# EAGLE board ir-pcb-sheet (EAGLE 9.6.2), part 1 of 2
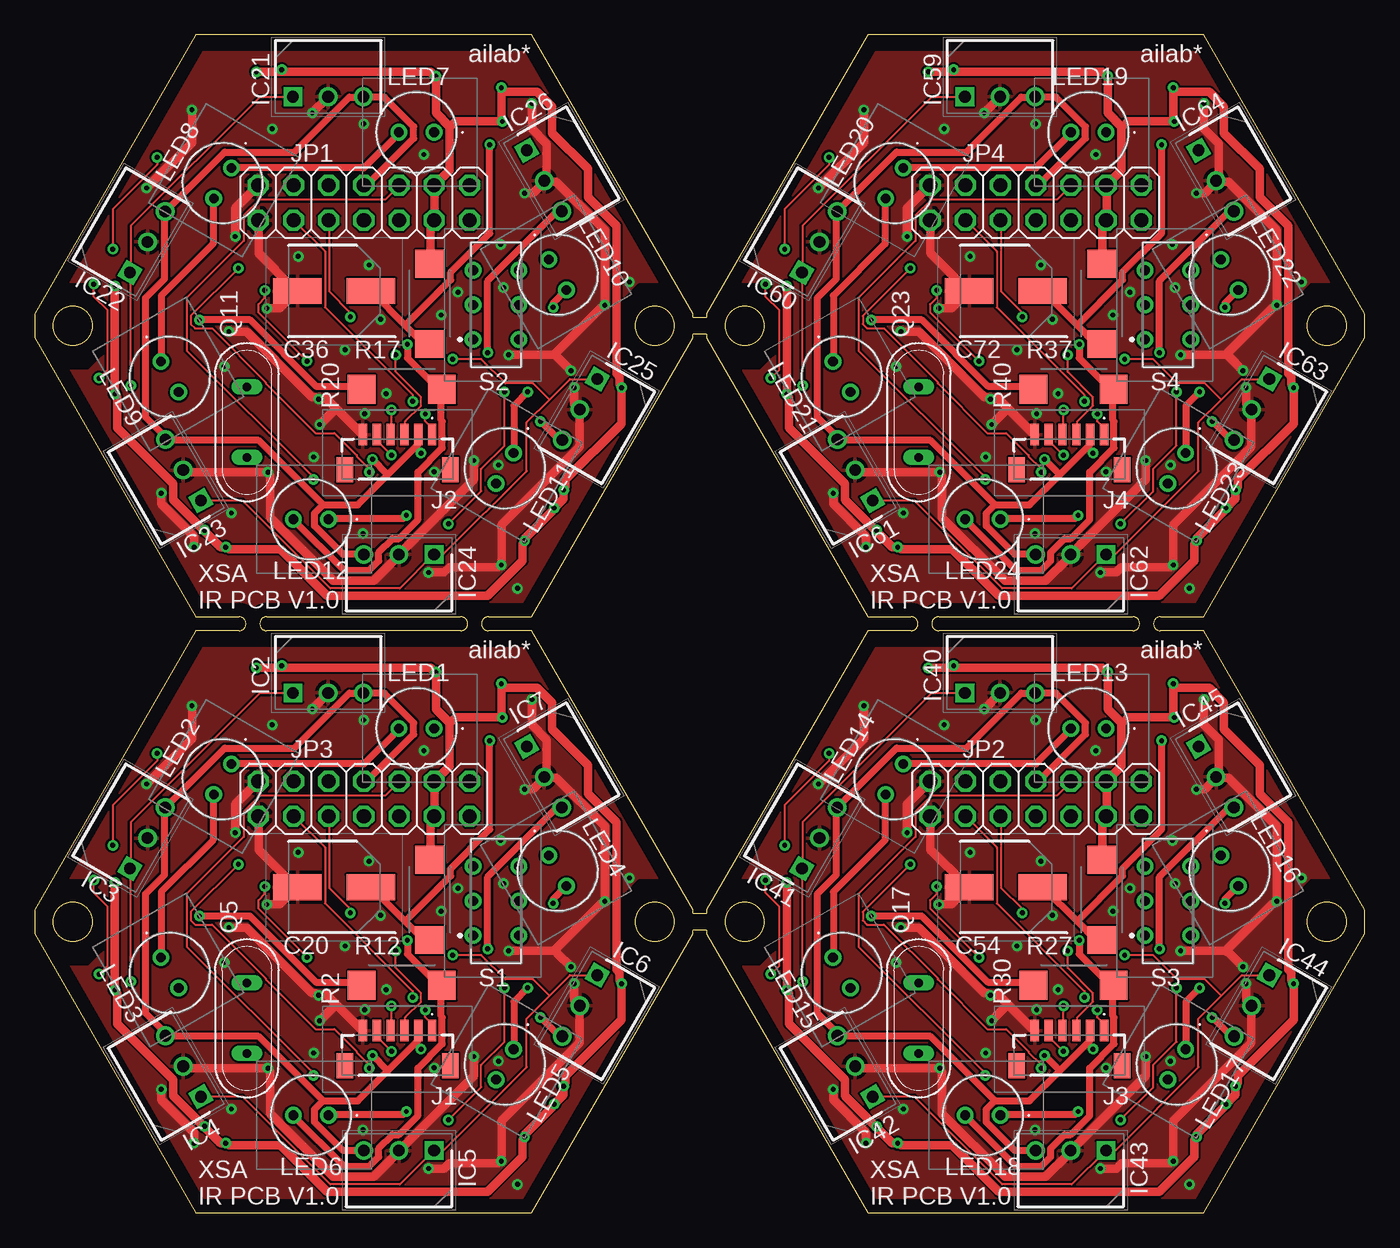
[diagram p0: board, top side]
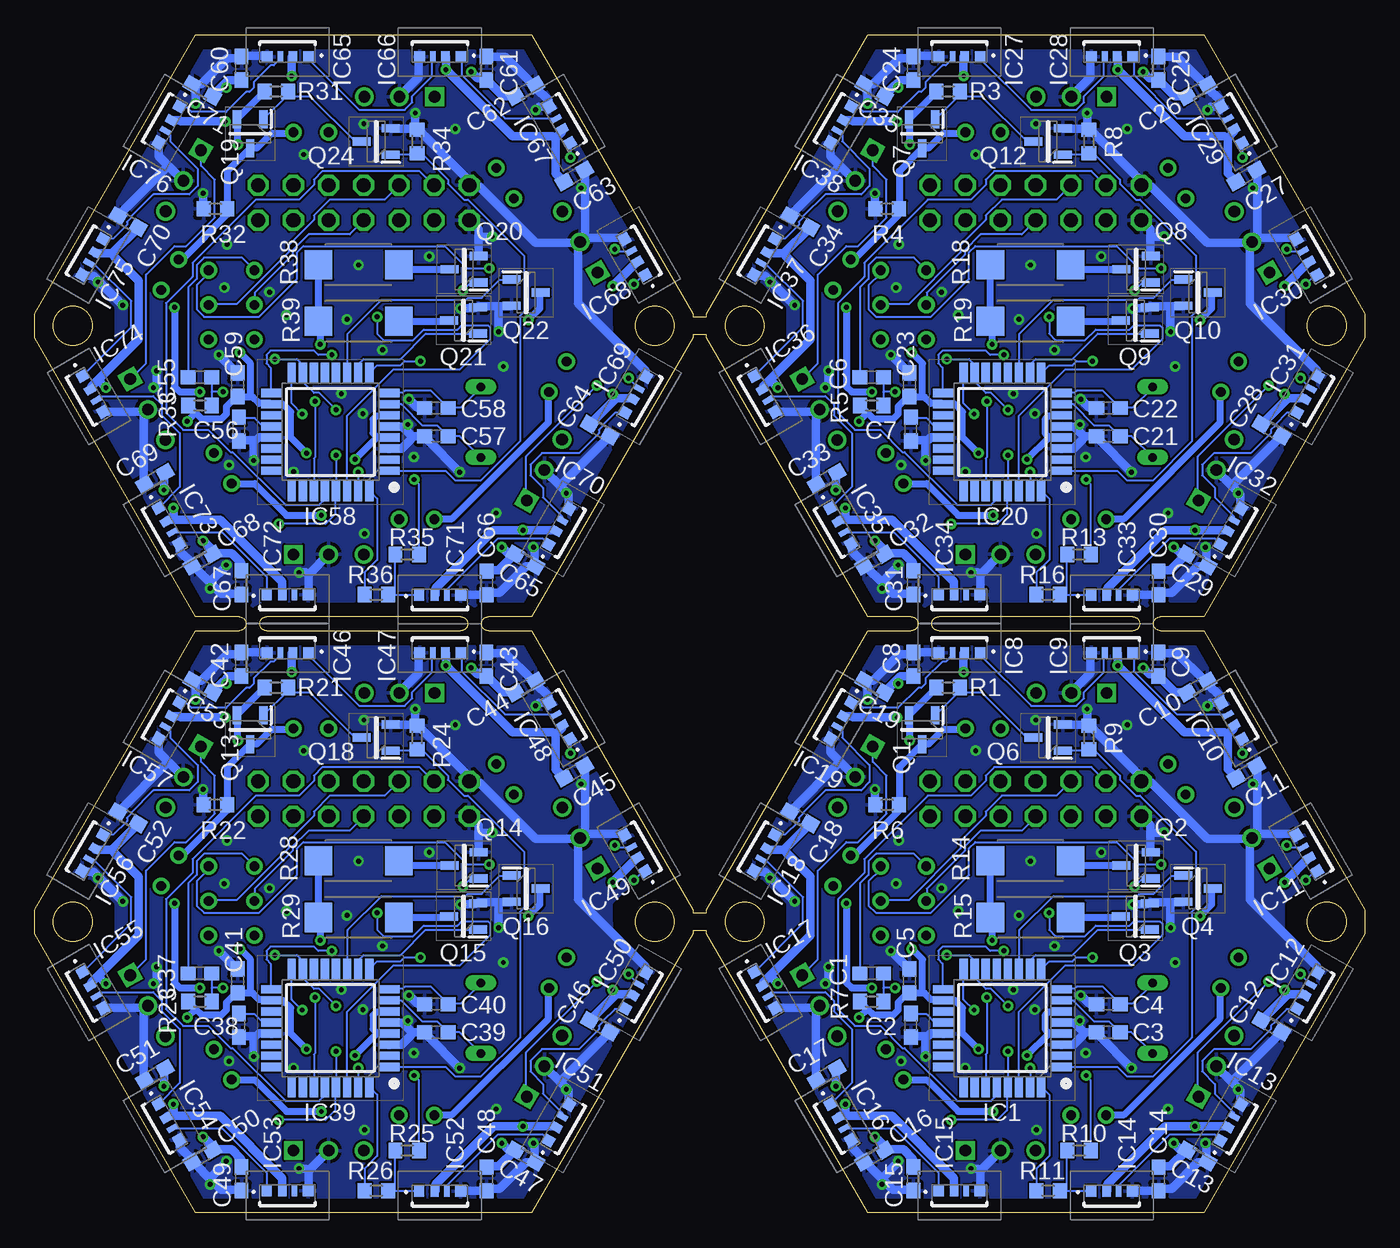
[diagram p1: board, bottom side, seen from below]

Size 96 x 85 mm. Coordinates in mm from the lower left corner, seen from the top.
Outline: 16.75,43 arc180 16.75,42 30.75,42 arc180 30.75,43 16.75,43
Outline: 14.75,42 arc180 14.75,43 11.63,43 0,63.14 0,64.86 11.63,85 35.87,85 47.5,64.86 47.5,64.6 48.5,64.6 48.5,64.86 60.13,85 84.37,85 96,64.86 96,63.14 84.37,43 81.25,43 arc180 81.25,42 84.37,42 96,21.86 96,20.14 84.37,0 60.13,0 48.5,20.14 48.5,20.4 47.5,20.4 47.5,20.14 35.87,0 11.63,0 0,20.14 0,21.86 11.63,42 14.75,42
Outline: 60.13,43 63.25,43 arc-180 63.25,42 60.13,42 48.5,21.86 48.5,21.6 47.5,21.6 47.5,21.86 35.87,42 32.75,42 arc-180 32.75,43 35.87,43 47.5,63.14 47.5,63.4 48.5,63.4 48.5,63.14 60.13,43
Outline: 65.25,43 79.25,43 arc-180 79.25,42 65.25,42 arc-180 65.25,43
Outline: circle at 93.25,64 radius 1.4
Outline: circle at 51.25,64 radius 1.4
Outline: circle at 44.75,64 radius 1.4
Outline: circle at 2.75,64 radius 1.4
Outline: circle at 93.25,21 radius 1.4
Outline: circle at 51.25,21 radius 1.4
Outline: circle at 44.75,21 radius 1.4
Outline: circle at 2.75,21 radius 1.4
Copper layers (1*16): Top 0.035mm / dielectric 1.5mm / Bottom 0.035mm
Design rules "default": minimum track width 6mil, minimum drill 0.35mm, track to track 6mil, track to pad 6mil, pad to pad 6mil, via to via 6mil, smd to smd 6mil, copper to edge 40mil, drill to drill 6mil, minimum pad ring 10mil, minimum via ring 8mil, stop-mask expansion 4mil, vias tented up to drill 0mil, thermal gap 10mil
Net classes: 1 POWER: width 0.508 mm; 2 LEDPOWER: width 0.61 mm

## Footprints (pad centres in the part's own frame; a part is rotated, then mirrored left to right if it is on the bottom)
C0603 = smd 1.1 x 1: 1 -0.85,0; 2 0.85,0
CAPAE660X800N = smd 3.5 x 1.85: 1 -2.65,0; 2 2.65,0
QFP80P900X900X120-32N = smd 1.5 x 0.6: 1 -4.25,2.8; 2 -4.25,2; 3 -4.25,1.2; 4 -4.25,0.4; 5 -4.25,-0.4; 6 -4.25,-1.2; 7 -4.25,-2; 8 -4.25,-2.8; 17 4.25,-2.8; 18 4.25,-2; 19 4.25,-1.2; 20 4.25,-0.4; 21 4.25,0.4; 22 4.25,1.2; 23 4.25,2; 24 4.25,2.8 | smd 0.6 x 1.5: 9 -2.8,-4.25; 10 -2,-4.25; 11 -1.2,-4.25; 12 -0.4,-4.25; 13 0.4,-4.25; 14 1.2,-4.25; 15 2,-4.25; 16 2.8,-4.25; 25 2.8,4.25; 26 2,4.25; 27 1.2,4.25; 28 0.4,4.25; 29 -0.4,4.25; 30 -1.2,4.25; 31 -2,4.25; 32 -2.8,4.25
TO254P525X740X825-3P = drill 0.84 pad 1.26 square: 1 0,0 | drill 0.84 pad 1.26: 2 2.54,0; 3 5.08,0
SK6812SIDE = smd 0.75 x 0.8: 1 -1.505,0.325 | smd 0.6 x 0.8: 2 -0.38,0.325 | smd 0.4 x 0.8: 3 0.5,0.325 | smd 0.8 x 0.8: 4 1.48,0.325
BM06BSRSSTBTLFSN = smd 0.6 x 1.55: 1 -2.5,-1.612; 2 -1.5,-1.612; 3 -0.5,-1.612; 4 0.5,-1.612; 5 1.5,-1.612; 6 2.5,-1.612 | smd 1.2 x 1.8: MP1 -3.8,0.912; MP2 3.8,0.912
2X07 = drill 1.016 octagon: 1 -7.62,-1.27; 2 -7.62,1.27; 3 -5.08,-1.27; 4 -5.08,1.27; 5 -2.54,-1.27; 6 -2.54,1.27; 7 0,-1.27; 8 0,1.27; 9 2.54,-1.27; 10 2.54,1.27; 11 5.08,-1.27; 12 5.08,1.27; 13 7.62,-1.27; 14 7.62,1.27
OSI5FU5111C40 = drill 0.7 pad 1.2: 1 0,0; 2 2.54,0
SOT95P237X112-3N = smd 1.3 x 0.6: 1 -1.05,0.95; 2 -1.05,-0.95; 3 1.05,0
QS = drill 0.61 long: 1 -2.54,0; 2 2.54,0
R0603 = smd 1 x 1.1: 1 -0.85,0; 2 0.85,0
R2512W = smd 2 x 2.1: 1 -2.896,0; 2 2.896,0
IS2235 = drill 0.7 pad 1.2: 1 -2.5,1.65; 2 0,1.65; 3 2.5,1.65; 4 -2.5,-1.65; 5 0,-1.65; 6 2.5,-1.65

## Placement (x,y rotation side)
C1  0.1u  [C0603]  35.59,17.27 0 bottom
C2  0.1u  [C0603]  32.77,13.54 90 bottom
C3  22p  [C0603]  18.52,13.03 0 bottom
C4  22p  [C0603]  18.52,15.06 0 bottom
C5  0.1u  [C0603]  32.87,16.74 270 bottom
C6  0.1u  [C0603]  35.59,60.27 0 bottom
C7  0.1u  [C0603]  32.77,56.54 90 bottom
C8  0.1u  [C0603]  32.59,39.57 270 bottom
C9  0.1u  [C0603]  14.91,39.57 270 bottom
C10  0.1u  [C0603]  12.09,37.95 210 bottom
C11  0.1u  [C0603]  8.56,31.8 210 bottom
C12  0.1u  [C0603]  6.73,13.46 150 bottom
C13  0.1u  [C0603]  12.09,4.09 150 bottom
C14  0.1u  [C0603]  14.88,2.44 90 bottom
C15  0.1u  [C0603]  32.59,2.46 90 bottom
C16  0.1u  [C0603]  35.41,4.09 30 bottom
C17  0.1u  [C0603]  38.84,9.98 30 bottom
C18  0.1u  [C0603]  40.77,28.5 330 bottom
C19  0.1u  [C0603]  35.41,37.97 330 bottom
C20  25PFV100M6.3X8  [CAPAE660X800N]  21.62,23.5 180 top
C21  22p  [C0603]  18.52,56.03 0 bottom
C22  22p  [C0603]  18.52,58.06 0 bottom
C23  0.1u  [C0603]  32.87,59.74 270 bottom
C24  0.1u  [C0603]  32.59,82.58 270 bottom
C25  0.1u  [C0603]  14.91,82.58 270 bottom
C26  0.1u  [C0603]  12.09,80.95 210 bottom
C27  0.1u  [C0603]  8.56,74.8 210 bottom
C28  0.1u  [C0603]  6.73,56.46 150 bottom
C29  0.1u  [C0603]  12.09,47.09 150 bottom
C30  0.1u  [C0603]  14.88,45.44 90 bottom
C31  0.1u  [C0603]  32.59,45.47 90 bottom
C32  0.1u  [C0603]  35.41,47.09 30 bottom
C33  0.1u  [C0603]  38.84,52.98 30 bottom
C34  0.1u  [C0603]  40.77,71.5 330 bottom
C35  0.1u  [C0603]  35.41,80.98 330 bottom
C36  25PFV100M6.3X8  [CAPAE660X800N]  21.62,66.5 180 top
C37  0.1u  [C0603]  84.07,17.27 0 bottom
C38  0.1u  [C0603]  81.25,13.54 90 bottom
C39  22p  [C0603]  67.01,13.03 0 bottom
C40  22p  [C0603]  67.01,15.06 0 bottom
C41  0.1u  [C0603]  81.36,16.74 270 bottom
C42  0.1u  [C0603]  81.08,39.57 270 bottom
C43  0.1u  [C0603]  63.4,39.57 270 bottom
C44  0.1u  [C0603]  60.58,37.95 210 bottom
C45  0.1u  [C0603]  57.05,31.8 210 bottom
C46  0.1u  [C0603]  55.22,13.46 150 bottom
C47  0.1u  [C0603]  60.58,4.09 150 bottom
C48  0.1u  [C0603]  63.37,2.44 90 bottom
C49  0.1u  [C0603]  81.08,2.46 90 bottom
C50  0.1u  [C0603]  83.9,4.09 30 bottom
C51  0.1u  [C0603]  87.33,9.98 30 bottom
C52  0.1u  [C0603]  89.26,28.5 330 bottom
C53  0.1u  [C0603]  83.9,37.97 330 bottom
C54  25PFV100M6.3X8  [CAPAE660X800N]  70.1,23.5 180 top
C55  0.1u  [C0603]  84.07,60.27 0 bottom
C56  0.1u  [C0603]  81.25,56.54 90 bottom
C57  22p  [C0603]  67.01,56.03 0 bottom
C58  22p  [C0603]  67.01,58.06 0 bottom
C59  0.1u  [C0603]  81.36,59.74 270 bottom
C60  0.1u  [C0603]  81.08,82.58 270 bottom
C61  0.1u  [C0603]  63.4,82.58 270 bottom
C62  0.1u  [C0603]  60.58,80.95 210 bottom
C63  0.1u  [C0603]  57.05,74.8 210 bottom
C64  0.1u  [C0603]  55.22,56.46 150 bottom
C65  0.1u  [C0603]  60.58,47.09 150 bottom
C66  0.1u  [C0603]  63.37,45.44 90 bottom
C67  0.1u  [C0603]  81.08,45.47 90 bottom
C68  0.1u  [C0603]  83.9,47.09 30 bottom
C69  0.1u  [C0603]  87.33,52.98 30 bottom
C70  0.1u  [C0603]  89.26,71.5 330 bottom
C71  0.1u  [C0603]  83.9,80.98 330 bottom
C72  25PFV100M6.3X8  [CAPAE660X800N]  70.1,66.5 180 top
IC1  ATMEGA328P-AU  [QFP80P900X900X120-32N]  26.16,13.34 180 bottom
IC2  PL-IRM0101  [TO254P525X740X825-3P]  18.64,37.52 0 top
IC3  PL-IRM0101  [TO254P525X740X825-3P]  6.88,24.84 60 top
IC4  PL-IRM0101  [TO254P525X740X825-3P]  11.99,8.38 120 top
IC5  PL-IRM0101  [TO254P525X740X825-3P]  28.83,4.5 180 top
IC6  PL-IRM0101  [TO254P525X740X825-3P]  40.61,17.14 240 top
IC7  PL-IRM0101  [TO254P525X740X825-3P]  35.51,33.66 300 top
IC8  SK6812_SIDE  [SK6812SIDE]  29.26,40.74 180 bottom
IC9  SK6812_SIDE  [SK6812SIDE]  18.26,40.74 180 bottom
IC10  SK6812_SIDE  [SK6812SIDE]  9.35,35.66 120 bottom
IC11  SK6812_SIDE  [SK6812SIDE]  3.91,26.11 120 bottom
IC12  SK6812_SIDE  [SK6812SIDE]  3.86,15.88 60 bottom
IC13  SK6812_SIDE  [SK6812SIDE]  9.4,6.35 60 bottom
IC14  SK6812_SIDE  [SK6812SIDE]  18.26,1.24 0 bottom
IC15  SK6812_SIDE  [SK6812SIDE]  29.26,1.27 0 bottom
IC16  SK6812_SIDE  [SK6812SIDE]  38.1,6.38 300 bottom
IC17  SK6812_SIDE  [SK6812SIDE]  43.59,15.9 300 bottom
IC18  SK6812_SIDE  [SK6812SIDE]  43.61,26.11 240 bottom
IC19  SK6812_SIDE  [SK6812SIDE]  38.1,35.66 240 bottom
IC20  ATMEGA328P-AU  [QFP80P900X900X120-32N]  26.16,56.34 180 bottom
IC21  PL-IRM0101  [TO254P525X740X825-3P]  18.64,80.52 0 top
IC22  PL-IRM0101  [TO254P525X740X825-3P]  6.88,67.84 60 top
IC23  PL-IRM0101  [TO254P525X740X825-3P]  11.99,51.38 120 top
IC24  PL-IRM0101  [TO254P525X740X825-3P]  28.83,47.5 180 top
IC25  PL-IRM0101  [TO254P525X740X825-3P]  40.61,60.15 240 top
IC26  PL-IRM0101  [TO254P525X740X825-3P]  35.51,76.66 300 top
IC27  SK6812_SIDE  [SK6812SIDE]  29.26,83.74 180 bottom
IC28  SK6812_SIDE  [SK6812SIDE]  18.26,83.74 180 bottom
IC29  SK6812_SIDE  [SK6812SIDE]  9.35,78.66 120 bottom
IC30  SK6812_SIDE  [SK6812SIDE]  3.91,69.11 120 bottom
IC31  SK6812_SIDE  [SK6812SIDE]  3.86,58.88 60 bottom
IC32  SK6812_SIDE  [SK6812SIDE]  9.4,49.35 60 bottom
IC33  SK6812_SIDE  [SK6812SIDE]  18.26,44.25 0 bottom
IC34  SK6812_SIDE  [SK6812SIDE]  29.26,44.27 0 bottom
IC35  SK6812_SIDE  [SK6812SIDE]  38.1,49.38 300 bottom
IC36  SK6812_SIDE  [SK6812SIDE]  43.59,58.9 300 bottom
IC37  SK6812_SIDE  [SK6812SIDE]  43.61,69.11 240 bottom
IC38  SK6812_SIDE  [SK6812SIDE]  38.1,78.66 240 bottom
IC39  ATMEGA328P-AU  [QFP80P900X900X120-32N]  74.65,13.34 180 bottom
IC40  PL-IRM0101  [TO254P525X740X825-3P]  67.13,37.52 0 top
IC41  PL-IRM0101  [TO254P525X740X825-3P]  55.37,24.84 60 top
IC42  PL-IRM0101  [TO254P525X740X825-3P]  60.48,8.38 120 top
IC43  PL-IRM0101  [TO254P525X740X825-3P]  77.32,4.5 180 top
IC44  PL-IRM0101  [TO254P525X740X825-3P]  89.1,17.14 240 top
IC45  PL-IRM0101  [TO254P525X740X825-3P]  84,33.66 300 top
IC46  SK6812_SIDE  [SK6812SIDE]  77.75,40.74 180 bottom
IC47  SK6812_SIDE  [SK6812SIDE]  66.75,40.74 180 bottom
IC48  SK6812_SIDE  [SK6812SIDE]  57.84,35.66 120 bottom
IC49  SK6812_SIDE  [SK6812SIDE]  52.4,26.11 120 bottom
IC50  SK6812_SIDE  [SK6812SIDE]  52.35,15.88 60 bottom
IC51  SK6812_SIDE  [SK6812SIDE]  57.89,6.35 60 bottom
IC52  SK6812_SIDE  [SK6812SIDE]  66.75,1.24 0 bottom
IC53  SK6812_SIDE  [SK6812SIDE]  77.75,1.27 0 bottom
IC54  SK6812_SIDE  [SK6812SIDE]  86.59,6.38 300 bottom
IC55  SK6812_SIDE  [SK6812SIDE]  92.08,15.9 300 bottom
IC56  SK6812_SIDE  [SK6812SIDE]  92.1,26.11 240 bottom
IC57  SK6812_SIDE  [SK6812SIDE]  86.59,35.66 240 bottom
IC58  ATMEGA328P-AU  [QFP80P900X900X120-32N]  74.65,56.34 180 bottom
IC59  PL-IRM0101  [TO254P525X740X825-3P]  67.13,80.52 0 top
IC60  PL-IRM0101  [TO254P525X740X825-3P]  55.37,67.84 60 top
IC61  PL-IRM0101  [TO254P525X740X825-3P]  60.48,51.38 120 top
IC62  PL-IRM0101  [TO254P525X740X825-3P]  77.32,47.5 180 top
IC63  PL-IRM0101  [TO254P525X740X825-3P]  89.1,60.15 240 top
IC64  PL-IRM0101  [TO254P525X740X825-3P]  84,76.66 300 top
IC65  SK6812_SIDE  [SK6812SIDE]  77.75,83.74 180 bottom
IC66  SK6812_SIDE  [SK6812SIDE]  66.75,83.74 180 bottom
IC67  SK6812_SIDE  [SK6812SIDE]  57.84,78.66 120 bottom
IC68  SK6812_SIDE  [SK6812SIDE]  52.4,69.11 120 bottom
IC69  SK6812_SIDE  [SK6812SIDE]  52.35,58.88 60 bottom
IC70  SK6812_SIDE  [SK6812SIDE]  57.89,49.35 60 bottom
IC71  SK6812_SIDE  [SK6812SIDE]  66.75,44.25 0 bottom
IC72  SK6812_SIDE  [SK6812SIDE]  77.75,44.27 0 bottom
IC73  SK6812_SIDE  [SK6812SIDE]  86.59,49.38 300 bottom
IC74  SK6812_SIDE  [SK6812SIDE]  92.08,58.9 300 bottom
IC75  SK6812_SIDE  [SK6812SIDE]  92.1,69.11 240 bottom
IC76  SK6812_SIDE  [SK6812SIDE]  86.59,78.66 240 bottom
J1  BM06B-SRSS-TBT_LF__SN_  [BM06BSRSSTBTLFSN]  26.19,11.53 180 top
J2  BM06B-SRSS-TBT_LF__SN_  [BM06BSRSSTBTLFSN]  26.19,54.53 180 top
J3  BM06B-SRSS-TBT_LF__SN_  [BM06BSRSSTBTLFSN]  74.68,11.53 180 top
J4  BM06B-SRSS-TBT_LF__SN_  [BM06BSRSSTBTLFSN]  74.68,54.53 180 top
JP1  Stacking Connector  [2X07]  23.76,72.88 0 top
JP2  Stacking Connector  [2X07]  72.25,29.88 0 top
JP3  Stacking Connector  [2X07]  23.76,29.88 0 top
JP4  Stacking Connector  [2X07]  72.25,72.88 0 top
LED1  OSI5FU5111C-40  [OSI5FU5111C40]  28.83,34.95 180 top
LED2  OSI5FU5111C-40  [OSI5FU5111C40]  14.2,32.38 240 top
LED3  OSI5FU5111C-40  [OSI5FU5111C40]  9.12,18.41 300 top
LED4  OSI5FU5111C-40  [OSI5FU5111C40]  37.11,25.78 300 top
LED5  OSI5FU5111C-40  [OSI5FU5111C40]  34.57,11.81 240 top
LED6  OSI5FU5111C-40  [OSI5FU5111C40]  21.21,7.04 180 top
LED7  OSI5FU5111C-40  [OSI5FU5111C40]  28.83,77.95 180 top
LED8  OSI5FU5111C-40  [OSI5FU5111C40]  14.2,75.39 240 top
LED9  OSI5FU5111C-40  [OSI5FU5111C40]  9.12,61.42 300 top
LED10  OSI5FU5111C-40  [OSI5FU5111C40]  37.11,68.78 300 top
LED11  OSI5FU5111C-40  [OSI5FU5111C40]  34.57,54.81 240 top
LED12  OSI5FU5111C-40  [OSI5FU5111C40]  21.21,50.04 180 top
LED13  OSI5FU5111C-40  [OSI5FU5111C40]  77.32,34.95 180 top
LED14  OSI5FU5111C-40  [OSI5FU5111C40]  62.69,32.38 240 top
LED15  OSI5FU5111C-40  [OSI5FU5111C40]  57.61,18.41 300 top
LED16  OSI5FU5111C-40  [OSI5FU5111C40]  85.6,25.78 300 top
LED17  OSI5FU5111C-40  [OSI5FU5111C40]  83.06,11.81 240 top
LED18  OSI5FU5111C-40  [OSI5FU5111C40]  69.7,7.04 180 top
LED19  OSI5FU5111C-40  [OSI5FU5111C40]  77.32,77.95 180 top
LED20  OSI5FU5111C-40  [OSI5FU5111C40]  62.69,75.39 240 top
LED21  OSI5FU5111C-40  [OSI5FU5111C40]  57.61,61.42 300 top
LED22  OSI5FU5111C-40  [OSI5FU5111C40]  85.6,68.78 300 top
LED23  OSI5FU5111C-40  [OSI5FU5111C40]  83.06,54.81 240 top
LED24  OSI5FU5111C-40  [OSI5FU5111C40]  69.7,50.04 180 top
Q1  IRLML6402  [SOT95P237X112-3N]  31.95,34.85 270 bottom
Q2  IRFML8244  [SOT95P237X112-3N]  16.51,25.07 180 bottom
Q3  IRFML8244  [SOT95P237X112-3N]  16.56,21.39 180 bottom
Q4  IRFML8244  [SOT95P237X112-3N]  12.04,23.39 0 bottom
Q5  8MHz  [QS]  15.32,14.05 90 top
Q6  IRFML8244  [SOT95P237X112-3N]  22.86,34.29 180 bottom
Q7  IRLML6402  [SOT95P237X112-3N]  31.95,77.85 270 bottom
Q8  IRFML8244  [SOT95P237X112-3N]  16.51,68.07 180 bottom
Q9  IRFML8244  [SOT95P237X112-3N]  16.56,64.39 180 bottom
Q10  IRFML8244  [SOT95P237X112-3N]  12.04,66.4 0 bottom
Q11  8MHz  [QS]  15.32,57.05 90 top
Q12  IRFML8244  [SOT95P237X112-3N]  22.86,77.29 180 bottom
Q13  IRLML6402  [SOT95P237X112-3N]  80.44,34.85 270 bottom
Q14  IRFML8244  [SOT95P237X112-3N]  65,25.07 180 bottom
Q15  IRFML8244  [SOT95P237X112-3N]  65.05,21.39 180 bottom
Q16  IRFML8244  [SOT95P237X112-3N]  60.53,23.39 0 bottom
Q17  8MHz  [QS]  63.8,14.05 90 top
Q18  IRFML8244  [SOT95P237X112-3N]  71.35,34.29 180 bottom
Q19  IRLML6402  [SOT95P237X112-3N]  80.44,77.85 270 bottom
Q20  IRFML8244  [SOT95P237X112-3N]  65,68.07 180 bottom
Q21  IRFML8244  [SOT95P237X112-3N]  65.05,64.39 180 bottom
Q22  IRFML8244  [SOT95P237X112-3N]  60.53,66.4 0 bottom
Q23  8MHz  [QS]  63.8,57.05 90 top
Q24  IRFML8244  [SOT95P237X112-3N]  71.35,77.29 180 bottom
R1  1k  [R0603]  30.07,37.9 0 bottom
R2  39  [R2512W]  26.49,16.41 0 top
R3  1k  [R0603]  30.07,80.9 0 bottom
R4  1k  [R0603]  34.47,72.44 0 bottom
R5  10k  [R0603]  35.59,58.24 0 bottom
R6  1k  [R0603]  34.47,29.44 0 bottom
R7  10k  [R0603]  35.59,15.24 0 bottom
R8  1k  [R0603]  19.91,77.29 270 bottom
R9  1k  [R0603]  19.91,34.29 270 bottom
R10  0  [R0603]  20.62,4.5 0 bottom
R11  0  [R0603]  22.86,1.6 180 bottom
R12  1  [R2512W]  28.52,22.58 90 top
R13  0  [R0603]  20.62,47.5 0 bottom
R14  2  [R2512W]  24.13,25.4 180 bottom
R15  10  [R2512W]  24.13,21.31 180 bottom
R16  0  [R0603]  22.86,44.6 180 bottom
R17  1  [R2512W]  28.52,65.58 90 top
R18  2  [R2512W]  24.13,68.4 180 bottom
R19  10  [R2512W]  24.13,64.31 180 bottom
R20  39  [R2512W]  26.49,59.41 0 top
R21  1k  [R0603]  78.56,37.9 0 bottom
R22  1k  [R0603]  82.96,29.44 0 bottom
R23  10k  [R0603]  84.07,15.24 0 bottom
R24  1k  [R0603]  68.4,34.29 270 bottom
R25  0  [R0603]  69.11,4.5 0 bottom
R26  0  [R0603]  71.35,1.6 180 bottom
R27  1  [R2512W]  77.01,22.58 90 top
R28  2  [R2512W]  72.62,25.4 180 bottom
R29  10  [R2512W]  72.62,21.31 180 bottom
R30  39  [R2512W]  74.98,16.41 0 top
R31  1k  [R0603]  78.56,80.9 0 bottom
R32  1k  [R0603]  82.96,72.44 0 bottom
R33  10k  [R0603]  84.07,58.24 0 bottom
R34  1k  [R0603]  68.4,77.29 270 bottom
R35  0  [R0603]  69.11,47.5 0 bottom
R36  0  [R0603]  71.35,44.6 180 bottom
R37  1  [R2512W]  77.01,65.58 90 top
R38  2  [R2512W]  72.62,68.4 180 bottom
R39  10  [R2512W]  72.62,64.31 180 bottom
R40  39  [R2512W]  74.98,59.41 0 top
S1  IS-2235  [IS2235]  33.3,22.5 90 top
S2  IS-2235  [IS2235]  33.3,65.51 90 top
S3  IS-2235  [IS2235]  81.79,22.5 90 top
S4  IS-2235  [IS2235]  81.79,65.51 90 top

## Library data of the parts
C1-C19 C21-C35 C37-C53 C55-C71 = rcl; SPICEPREFIX: C
C20 C36 C54 C72 = SamacSys_Parts; DESCRIPTION: Aluminum Organic Polymer Capacitors HIGH TEMP HYBRID CAPACITOR; HEIGHT: 8mm; MANUFACTURER_NAME: Rubycon; MANUFACTURER_PART_NUMBER: 25PFV100M6.3X8; MOUSER_PART_NUMBER: 232-25PFV100M6.3X8; MOUSER_PRICE-STOCK: https://www.mouser.co.uk/ProductDetail/Rubycon/25PFV100M6.3X8?qs=T3oQrply3y8JF6DDLdeIPA%3D%3D
IC1 IC20 IC39 IC58 = SamacSys_Parts; ARROW_PART_NUMBER: ATMEGA328P-AU; ARROW_PRICE-STOCK: https://www.arrow.com/en/products/atmega328p-au/microchip-technology?region=nac; DESCRIPTION: MICROCHIP - ATMEGA328P-AU. - MICROCONTROLLER MCU, 8 BIT, ATMEGA, 20MHZ, TQFP-32; HEIGHT: 1.2mm; MANUFACTURER_NAME: Microchip; MANUFACTURER_PART_NUMBER: ATMEGA328P-AU; MOUSER_PART_NUMBER: 556-ATMEGA328P-AU; MOUSER_PRICE-STOCK: https://www.mouser.co.uk/ProductDetail/Microchip-Technology-Atmel/ATMEGA328P-AU?qs=K8BHR703ZXiCmmgp6%2FGNmQ%3D%3D
IC2-IC7 IC21-IC26 IC40-IC45 IC59-IC64 = SamacSys_Parts; DESCRIPTION: INFRARED REMOTE CONTROL RECEIVER MODULE; HEIGHT: 5.25mm; MANUFACTURER_NAME: Para Light Electronics; MANUFACTURER_PART_NUMBER: PL-IRM0101
IC8-IC19 IC27-IC38 IC46-IC57 IC65-IC76 = SamacSys_Parts; DESCRIPTION: SK6812 SIDE/SK6805 SIDE is a smart LED control circuit; HEIGHT: 2.05mm; MANUFACTURER_NAME: Shenzhen Normand Electronic; MANUFACTURER_PART_NUMBER: SK6812 SIDE
J1-J4 = SamacSys_Parts; ARROW_PART_NUMBER: BM06B-SRSS-TBT(LF)(SN); ARROW_PRICE-STOCK: https://www.arrow.com/en/products/bm06b-srss-tbt-lf-sn/jst-manufacturing; DESCRIPTION: Conn Shrouded Header HDR 6 POS 1mm Solder ST SMD T/R; HEIGHT: 4.25mm; MANUFACTURER_NAME: JST (JAPAN SOLDERLESS TERMINALS); MANUFACTURER_PART_NUMBER: BM06B-SRSS-TBT(LF)(SN)
JP1-JP4 = pinhead
LED1-LED24 = SamacSys_Parts; DESCRIPTION: 5mm Round Infared LED; HEIGHT: 8.7mm; MANUFACTURER_NAME: OptoSupply; MANUFACTURER_PART_NUMBER: OSI5FU5111C-40
Q1 Q7 Q13 Q19 = SamacSys_Parts; DESCRIPTION: P-Channel MOSFET Transistor, 3.7 A, 20 V, 3-Pin SOT-23 International Rectifier IRLML6402; HEIGHT: 1.12mm; MANUFACTURER_NAME: Infineon; MANUFACTURER_PART_NUMBER: IRLML6402; MOUSER_PART_NUMBER: N/A; MOUSER_PRICE-STOCK: https://www.mouser.co.uk/ProductDetail/Infineon-IR/IRLML6402?qs=Gkr2N%2F2q3o277qI%252BRzUP%252Bw%3D%3D
Q2-Q4 Q6 Q8-Q10 Q12 Q14-Q16 Q18 Q20-Q22 Q24 = SamacSys_Parts; DESCRIPTION: HEXFET Power MOSFET 25V; HEIGHT: 1.12mm; MANUFACTURER_NAME: Infineon; MANUFACTURER_PART_NUMBER: IRFML8244; MOUSER_PART_NUMBER: N/A; MOUSER_PRICE-STOCK: https://www.mouser.co.uk/ProductDetail/Infineon-Technologies/IRFML8244?qs=bAKSY%2FctAC4ez%2FysLA2f0A%3D%3D
Q5 Q11 Q17 Q23 = special
R1-R40 = rcl; SPICEPREFIX: R
S1-S4 = SamacSys_Parts; DESCRIPTION: Tiny Slide Switch, 2P2T; HEIGHT: 5mm; MANUFACTURER_NAME: Switronic; MANUFACTURER_PART_NUMBER: IS-2235

## Nets
+3V1 [POWER]: C23.2 IC20.4 IC20.6 IC20.18 IC21.3 IC22.3 IC23.3 IC24.3 IC25.3 IC26.3 J2.2 JP1.8 R5.1
+3V2 [POWER]: C41.2 IC39.4 IC39.6 IC39.18 IC40.3 IC41.3 IC42.3 IC43.3 IC44.3 IC45.3 J3.2 JP2.8 R23.1
+3V3 [POWER]: C5.2 IC1.4 IC1.6 IC1.18 IC2.3 IC3.3 IC4.3 IC5.3 IC6.3 IC7.3 J1.2 JP3.8 R7.1
+3V4 [POWER]: C59.2 IC58.4 IC58.6 IC58.18 IC59.3 IC60.3 IC61.3 IC62.3 IC63.3 IC64.3 J4.2 JP4.8 R33.1
GND [LEDPOWER]: C2.1 C3.1 C4.1 C5.1 C8.1 C9.1 C10.1 C11.1 C12.1 C13.1 C14.1 C15.1 C16.1 C17.1 C18.1 C19.1 C20.2 IC1.3 IC1.5 IC1.21 IC2.2 IC3.2 IC4.2 IC5.2 IC6.2 IC7.2 IC8.4 IC9.4 IC10.4 IC11.4 IC12.4 IC13.4 IC14.4 IC15.4 IC16.4 IC17.4 IC18.4 IC19.4 J1.6 JP3.1 JP3.2 Q2.2 Q3.2 Q4.2 Q6.2 R6.1 R9.1
GND1 [LEDPOWER]: C7.1 C21.1 C22.1 C23.1 C24.1 C25.1 C26.1 C27.1 C28.1 C29.1 C30.1 C31.1 C32.1 C33.1 C34.1 C35.1 C36.2 IC20.3 IC20.5 IC20.21 IC21.2 IC22.2 IC23.2 IC24.2 IC25.2 IC26.2 IC27.4 IC28.4 IC29.4 IC30.4 IC31.4 IC32.4 IC33.4 IC34.4 IC35.4 IC36.4 IC37.4 IC38.4 J2.6 JP1.1 JP1.2 Q8.2 Q9.2 Q10.2 Q12.2 R4.1 R8.1
GND2 [LEDPOWER]: C38.1 C39.1 C40.1 C41.1 C42.1 C43.1 C44.1 C45.1 C46.1 C47.1 C48.1 C49.1 C50.1 C51.1 C52.1 C53.1 C54.2 IC39.3 IC39.5 IC39.21 IC40.2 IC41.2 IC42.2 IC43.2 IC44.2 IC45.2 IC46.4 IC47.4 IC48.4 IC49.4 IC50.4 IC51.4 IC52.4 IC53.4 IC54.4 IC55.4 IC56.4 IC57.4 J3.6 JP2.1 JP2.2 Q14.2 Q15.2 Q16.2 Q18.2 R22.1 R24.1
GND3 [LEDPOWER]: C56.1 C57.1 C58.1 C59.1 C60.1 C61.1 C62.1 C63.1 C64.1 C65.1 C66.1 C67.1 C68.1 C69.1 C70.1 C71.1 C72.2 IC58.3 IC58.5 IC58.21 IC59.2 IC60.2 IC61.2 IC62.2 IC63.2 IC64.2 IC65.4 IC66.4 IC67.4 IC68.4 IC69.4 IC70.4 IC71.4 IC72.4 IC73.4 IC74.4 IC75.4 IC76.4 J4.6 JP4.1 JP4.2 Q20.2 Q21.2 Q22.2 Q24.2 R32.1 R34.1
LED1 [POWER]: LED1.1 LED4.1 Q1.3 R6.2
LED2 [POWER]: C20.1 Q1.2 R1.1 R12.1
LED3 [POWER]: LED4.2 LED5.1
LED4 [POWER]: LED1.2 LED2.1
LED5 [POWER]: LED5.2 LED6.1
LED6 [POWER]: LED2.2 LED3.1
LED7 [POWER]: LED3.2 LED6.2 R2.2 R14.2 R15.2
LED8 [POWER]: Q2.3 R14.1
LED9 [POWER]: Q3.3 R15.1
LED10 [POWER]: Q4.3 R2.1
LED11 [POWER]: LED7.2 LED8.1
LED12 [POWER]: LED8.2 LED9.1
LED13 [POWER]: LED10.2 LED11.1
LED14 [POWER]: LED11.2 LED12.1
LED15 [POWER]: LED7.1 LED10.1 Q7.3 R4.2
LED16 [POWER]: LED9.2 LED12.2 R18.2 R19.2 R20.2
LED17 [POWER]: Q8.3 R18.1
LED18 [POWER]: Q9.3 R19.1
LED19 [POWER]: Q10.3 R20.1
LED20 [POWER]: C36.1 Q7.2 R3.1 R17.1
LED21 [POWER]: LED13.2 LED14.1
LED22 [POWER]: LED14.2 LED15.1
LED23 [POWER]: LED16.2 LED17.1
LED24 [POWER]: LED17.2 LED18.1
LED25 [POWER]: LED13.1 LED16.1 Q13.3 R22.2
LED26 [POWER]: LED15.2 LED18.2 R28.2 R29.2 R30.2
LED27 [POWER]: Q14.3 R28.1
LED28 [POWER]: Q15.3 R29.1
LED29 [POWER]: Q16.3 R30.1
LED30 [POWER]: C54.1 Q13.2 R21.1 R27.1
LED31 [POWER]: LED19.2 LED20.1
LED32 [POWER]: LED20.2 LED21.1
LED33 [POWER]: LED22.2 LED23.1
LED34 [POWER]: LED23.2 LED24.1
LED35 [POWER]: LED19.1 LED22.1 Q19.3 R32.2
LED36 [POWER]: LED21.2 LED24.2 R38.2 R39.2 R40.2
LED37 [POWER]: Q20.3 R38.1
LED38 [POWER]: Q21.3 R39.1
LED39 [POWER]: Q22.3 R40.1
LED40 [POWER]: C72.1 Q19.2 R31.1 R37.1
N$1: IC1.16 J1.1
N$2: Q1.1 Q6.3 R1.2
N$3: JP3.6 S1.5
N$4: IC20.17 J2.3
N$5: IC1.17 J1.3
N$6: IC20.16 J2.1
N$7: IC20.1 Q12.1 R8.2
N$8: IC20.9 Q8.1
N$9: IC20.10 Q9.1
N$10: IC1.1 Q6.1 R9.2
N$11: IC8.1 IC9.3
N$12: IC20.11 Q10.1
N$13: C2.2 IC1.20
N$14: JP3.7 S1.2
N$15: IC20.28 JP1.4
N$16: IC20.30 JP1.5
N$17: C7.2 IC20.20
N$18: IC1.9 Q2.1
N$19: IC1.10 Q3.1
N$20: IC1.11 Q4.1
N$21: IC1.28 JP3.4
N$22: C3.2 IC1.7 Q5.1
N$23: IC1.30 JP3.5
N$24: IC13.1 IC14.3
N$25: C1.2 IC1.29 J1.5 R7.2
N$26: C4.2 IC1.8 Q5.2
N$27: C21.2 IC20.7 Q11.1
N$28: C1.1 S1.3
N$29: IC1.31 S1.6
N$30: IC1.27 JP3.3
N$31: IC12.1 IC13.3
N$32: IC11.1 IC12.3
N$33: IC10.1 IC11.3
N$34: IC9.1 IC10.3
N$35: C22.2 IC20.8 Q11.2
N$36: IC8.3 IC19.1
N$37: IC18.1 IC19.3
N$38: IC17.1 IC18.3
N$39: IC16.1 IC17.3
N$40: IC15.1 IC16.3
N$41: IC1.15 IC2.1 IC3.1 IC4.1 IC5.1 IC6.1 IC7.1 J1.4
N$42: JP3.10 R10.2
N$43: IC1.32 R11.2
N$44: IC14.1 R10.1 R11.1
N$45: C6.2 IC20.29 J2.5 R5.2
N$46: C6.1 S2.3
N$47: Q7.1 Q12.3 R3.2
N$48: IC20.27 JP1.3
N$49: JP1.6 S2.5
N$50: JP1.7 S2.2
N$51: IC20.31 S2.6
N$52: JP1.10 R13.2
N$53: IC20.32 R16.2
N$54: IC20.15 IC21.1 IC22.1 IC23.1 IC24.1 IC25.1 IC26.1 J2.4
N$55: IC32.1 IC33.3
N$56: IC31.1 IC32.3
N$57: IC30.1 IC31.3
N$58: IC29.1 IC30.3
N$59: IC28.1 IC29.3
N$60: IC33.1 R13.1 R16.1
N$61: IC27.3 IC38.1
N$62: IC37.1 IC38.3
N$63: IC36.1 IC37.3
N$64: IC35.1 IC36.3
N$65: IC34.1 IC35.3
N$66: IC27.1 IC28.3
N$67: IC39.17 J3.3
N$68: IC39.16 J3.1
N$69: IC39.1 Q18.1 R24.2
N$70: IC39.9 Q14.1
N$71: IC39.10 Q15.1
N$72: IC39.11 Q16.1
N$73: IC39.28 JP2.4
N$74: IC39.30 JP2.5
N$75: C38.2 IC39.20
N$76: C39.2 IC39.7 Q17.1
N$77: C40.2 IC39.8 Q17.2
N$78: C37.2 IC39.29 J3.5 R23.2
N$79: C37.1 S3.3
N$80: Q13.1 Q18.3 R21.2
N$81: IC39.27 JP2.3
N$82: JP2.6 S3.5
N$83: JP2.7 S3.2
N$84: IC39.31 S3.6
N$85: JP2.10 R25.2
N$86: IC39.32 R26.2
N$87: IC39.15 IC40.1 IC41.1 IC42.1 IC43.1 IC44.1 IC45.1 J3.4
N$88: IC51.1 IC52.3
N$89: IC50.1 IC51.3
N$90: IC49.1 IC50.3
N$91: IC48.1 IC49.3
N$92: IC47.1 IC48.3
N$93: IC52.1 R25.1 R26.1
N$94: IC46.3 IC57.1
N$95: IC56.1 IC57.3
N$96: IC55.1 IC56.3
N$97: IC54.1 IC55.3
N$98: IC53.1 IC54.3
N$99: IC46.1 IC47.3
N$100: IC58.17 J4.3
N$101: IC58.16 J4.1
N$102: IC58.1 Q24.1 R34.2
N$103: IC58.9 Q20.1
N$104: IC58.10 Q21.1
N$105: IC58.11 Q22.1
N$106: IC58.28 JP4.4
N$107: IC58.30 JP4.5
N$108: C56.2 IC58.20
N$109: C57.2 IC58.7 Q23.1
N$110: C58.2 IC58.8 Q23.2
N$111: C55.2 IC58.29 J4.5 R33.2
N$112: C55.1 S4.3
N$113: Q19.1 Q24.3 R31.2
N$114: IC58.27 JP4.3
N$115: JP4.6 S4.5
N$116: JP4.7 S4.2
N$117: IC58.31 S4.6
N$118: JP4.10 R35.2
N$119: IC58.32 R36.2
N$120: IC58.15 IC59.1 IC60.1 IC61.1 IC62.1 IC63.1 IC64.1 J4.4
N$121: IC70.1 IC71.3
N$122: IC69.1 IC70.3
N$123: IC68.1 IC69.3
N$124: IC67.1 IC68.3
N$125: IC66.1 IC67.3
N$126: IC71.1 R35.1 R36.1
N$127: IC65.3 IC76.1
N$128: IC75.1 IC76.3
N$129: IC74.1 IC75.3
N$130: IC73.1 IC74.3
N$131: IC72.1 IC73.3
N$132: IC65.1 IC66.3
VDD [LEDPOWER]: C8.2 C9.2 C10.2 C11.2 C12.2 C13.2 C14.2 C15.2 C16.2 C17.2 C18.2 C19.2 IC8.2 IC9.2 IC10.2 IC11.2 IC12.2 IC13.2 IC14.2 IC15.2 IC16.2 IC17.2 IC18.2 IC19.2 JP3.11 JP3.12 R12.2
VDD1 [LEDPOWER]: C24.2 C25.2 C26.2 C27.2 C28.2 C29.2 C30.2 C31.2 C32.2 C33.2 C34.2 C35.2 IC27.2 IC28.2 IC29.2 IC30.2 IC31.2 IC32.2 IC33.2 IC34.2 IC35.2 IC36.2 IC37.2 IC38.2 JP1.11 JP1.12 R17.2
VDD2 [LEDPOWER]: C42.2 C43.2 C44.2 C45.2 C46.2 C47.2 C48.2 C49.2 C50.2 C51.2 C52.2 C53.2 IC46.2 IC47.2 IC48.2 IC49.2 IC50.2 IC51.2 IC52.2 IC53.2 IC54.2 IC55.2 IC56.2 IC57.2 JP2.11 JP2.12 R27.2
VDD3 [LEDPOWER]: C60.2 C61.2 C62.2 C63.2 C64.2 C65.2 C66.2 C67.2 C68.2 C69.2 C70.2 C71.2 IC65.2 IC66.2 IC67.2 IC68.2 IC69.2 IC70.2 IC71.2 IC72.2 IC73.2 IC74.2 IC75.2 IC76.2 JP4.11 JP4.12 R37.2

## Tracks (layer width: path | path; a pad name or v marks a point on that pad's centre or on a via)
+3V1  (via drill 0.35)
  Top 0.508: v32.69,62.05 32.69,67.23 37.64,72.19 38.02,72.19 IC26.3 | v36.5,57.1 37.8,55.8 38.02,55.8 IC25.3 | JP1.8 23.77,74.17 24,74.17 27.36,77.52 27.36,78.36 25.22,80.49 23.77,80.49 IC21.3 23.47,80.49 22.71,80.49 18.75,76.53 13.72,76.53 9.6,72.42 IC22.3 9.37,72.19 9.37,67.39 8,66.02 8,57.4 9.37,56.03 IC23.3 9.45,55.73 16.15,55.73 20.8,51.08 | 25.49,53.25 23.32,51.08 20.8,51.08 | 25.49,53.25 27.47,55.23 | 27.47,55.23 27.66,55.42 27.66,56.11 J2.2 | 20.8,51.08 20.19,50.47 20.19,49.55 22.25,47.5 IC24.3 | 25.49,53.25 v24.38,54.36 | 27.47,55.23 v27.89,54.81
  Bottom 0.508: 31.93,58.85 31.77,58.85 31.32,58.4 30.48,58.4 IC20.18 30.18,58.32 29.57,58.32 29.03,57.78 29.03,55.96 v27.89,54.81 | 31.93,58.85 32.84,58.85 C23.2 33.07,58.78 33.68,58.17 33.68,57.63 34.06,57.25 35.43,57.25 35.89,57.71 | 35.89,57.71 36.42,58.24 R5.1 | v32.69,62.05 31.93,61.29 31.93,58.85 | 35.89,57.71 v36.5,57.1 | 22.78,55.96 21.95,55.96 IC20.4 | 22.78,55.96 23.09,56.26 23.09,57.25 22.86,57.48 21.95,57.48 IC20.6 | v24.38,54.36 22.78,55.96
+3V2  (via drill 0.35)
  Top 0.508: v81.18,19.05 81.18,24.23 86.13,29.18 86.51,29.18 IC45.3 | v84.99,14.1 86.28,12.8 86.51,12.8 IC44.3 | JP2.8 72.26,31.17 72.49,31.17 75.84,34.52 75.84,35.36 73.71,37.49 72.26,37.49 IC40.3 71.96,37.49 71.2,37.49 67.23,33.53 62.2,33.53 58.09,29.41 IC41.3 57.86,29.18 57.86,24.38 56.49,23.01 56.49,14.4 57.86,13.03 IC42.3 57.94,12.72 64.64,12.72 69.29,8.08 | 73.98,10.25 71.81,8.08 69.29,8.08 | 73.98,10.25 75.96,12.23 | 75.96,12.23 76.15,12.42 76.15,13.11 J3.2 | 69.29,8.08 68.68,7.47 68.68,6.55 70.74,4.5 IC43.3 | 73.98,10.25 v72.87,11.35 | 75.96,12.23 v76.38,11.81
  Bottom 0.508: 80.42,15.85 80.26,15.85 79.81,15.39 78.97,15.39 IC39.18 78.66,15.32 78.05,15.32 77.52,14.78 77.52,12.95 v76.38,11.81 | 80.42,15.85 81.33,15.85 C41.2 81.56,15.77 82.17,15.16 82.17,14.63 82.55,14.25 83.92,14.25 84.38,14.71 | 84.38,14.71 R23.1 | v81.18,19.05 80.42,18.29 80.42,15.85 | 84.38,14.71 v84.99,14.1 | 71.27,12.95 70.43,12.95 IC39.4 | 71.27,12.95 71.58,13.26 71.58,14.25 71.35,14.48 70.43,14.48 IC39.6 | v72.87,11.35 71.27,12.95
+3V3  (via drill 0.35)
  Top 0.508: v32.69,19.05 32.69,24.23 37.64,29.18 38.02,29.18 IC7.3 | v36.5,14.1 37.8,12.8 38.02,12.8 IC6.3 | JP3.8 23.77,31.17 24,31.17 27.36,34.52 27.36,35.36 25.22,37.49 23.77,37.49 IC2.3 23.47,37.49 22.71,37.49 18.75,33.53 13.72,33.53 9.6,29.41 IC3.3 9.37,29.18 9.37,24.38 8,23.01 8,14.4 9.37,13.03 IC4.3 9.45,12.72 16.15,12.72 20.8,8.08 | 25.49,10.25 23.32,8.08 20.8,8.08 | 25.49,10.25 27.47,12.23 | 27.47,12.23 27.66,12.42 27.66,13.11 J1.2 | 20.8,8.08 20.19,7.47 20.19,6.55 22.25,4.5 IC5.3 | 25.49,10.25 v24.38,11.35 | 27.47,12.23 v27.89,11.81
  Bottom 0.508: 31.93,15.85 31.77,15.85 31.32,15.39 30.48,15.39 IC1.18 30.18,15.32 29.57,15.32 29.03,14.78 29.03,12.95 v27.89,11.81 | 31.93,15.85 32.84,15.85 C5.2 33.07,15.77 33.68,15.16 33.68,14.63 34.06,14.25 35.43,14.25 35.89,14.71 | 35.89,14.71 36.42,15.24 R7.1 | v32.69,19.05 31.93,18.29 31.93,15.85 | 35.89,14.71 v36.5,14.1 | 22.78,12.95 21.95,12.95 IC1.4 | 22.78,12.95 23.09,13.26 23.09,14.25 22.86,14.48 21.95,14.48 IC1.6 | v24.38,11.35 22.78,12.95
+3V4  (via drill 0.35)
  Top 0.508: v81.18,62.05 81.18,67.23 86.13,72.19 86.51,72.19 IC64.3 | v84.99,57.1 86.28,55.8 86.51,55.8 IC63.3 | JP4.8 72.26,74.17 72.49,74.17 75.84,77.52 75.84,78.36 73.71,80.49 72.26,80.49 IC59.3 71.96,80.49 71.2,80.49 67.23,76.53 62.2,76.53 58.09,72.42 IC60.3 57.86,72.19 57.86,67.39 56.49,66.02 56.49,57.4 57.86,56.03 IC61.3 57.94,55.73 64.64,55.73 69.29,51.08 | 73.98,53.25 71.81,51.08 69.29,51.08 | 73.98,53.25 75.96,55.23 | 75.96,55.23 76.15,55.42 76.15,56.11 J4.2 | 69.29,51.08 68.68,50.47 68.68,49.55 70.74,47.5 IC62.3 | 73.98,53.25 v72.87,54.36 | 75.96,55.23 v76.38,54.81
  Bottom 0.508: 80.42,58.85 80.26,58.85 79.81,58.4 78.97,58.4 IC58.18 78.66,58.32 78.05,58.32 77.52,57.78 77.52,55.96 v76.38,54.81 | 80.42,58.85 81.33,58.85 C59.2 81.56,58.78 82.17,58.17 82.17,57.63 82.55,57.25 83.92,57.25 84.38,57.71 | 84.38,57.71 R33.1 | v81.18,62.05 80.42,61.29 80.42,58.85 | 84.38,57.71 v84.99,57.1 | 71.27,55.96 70.43,55.96 IC58.4 | 71.27,55.96 71.58,56.26 71.58,57.25 71.35,57.48 70.43,57.48 IC58.6 | v72.87,54.36 71.27,55.96
GND  (via drill 0.35)
  Top 0.61: v16.76,22.25 17.68,22.25 18.9,23.47 C20.2 18.67,23.7 16.15,26.21 16.15,28.57 JP3.1 | v20.04,36.35 21.18,37.49 IC2.2 | v14.48,27.43 14.48,29.49 16.08,31.09 JP3.2 | v11.35,36.58 11.35,34.21 v8.08,30.94 | IC7.2 36.8,31.39 37.64,31.39 41.15,27.89 v41.15,22.48 40.92,22.33 37.49,18.9 | 37.49,18.9 v34.21,18.9 | v35.36,30.56 35.97,30.56 36.58,31.17 IC7.2 | v35.89,37.03 35.89,35.2 36.96,34.14 36.96,31.7 IC7.2 | v31.7,11.28 31.7,9.91 IC5.2 26.14,4.27 24.46,2.59 21.57,2.59 16.99,7.16 16.99,10.21 v16.84,10.44 10.82,10.44 10.74,10.52 IC4.2 | 21.75,15.05 23.62,13.18 J1.6 | 21.75,15.05 21.11,15.7 v20.5,15.7 20.27,15.85 20.04,15.85 15.32,20.57 v14.02,20.57 | 21.75,15.05 v20.57,13.87 | v11.51,5.03 11.51,5.79 9.14,8.15 v9.14,8.91 | v28.42,3.2 29.57,3.2 29.95,3.58 33.45,3.58 v33.68,3.73 33.68,6.63 39.32,12.27 39.32,14.94 IC6.2 39.09,15.16 38.94,15.32 v38.94,16.54 | v38.71,17.75 37.72,18.75 37.49,18.9
  Bottom 0.61: 15.47,27.43 15.47,27.96 16.08,28.57 JP3.1 | 15.47,27.43 15.47,26.06 Q2.2 | 14.02,22.4 13.11,22.4 Q4.2 | 14.02,22.4 15.47,22.4 Q3.2 15.77,22.25 v16.76,22.25 | IC9.4 19.81,40.39 19.81,38.94 21.18,37.57 IC2.2 | R9.1 19.96,35.2 21.79,35.2 Q6.2 | R9.1 19.66,34.98 16.15,31.47 16.15,31.17 JP3.2 15.85,31.09 15.47,31.09 11.35,26.98 8.53,26.98 IC3.2 | v20.04,36.35 20.04,35.51 R9.1 | v14.48,27.43 15.47,27.43 | C9.1 14.86,40.39 13.56,40.39 11.66,38.48 C10.1 11.35,38.33 11.35,38.18 10.44,37.26 10.44,36.8 IC10.4 10.74,36.8 11.12,36.8 v11.35,36.58 | IC12.4 3.43,17.37 3.43,17.75 8.31,22.63 8.31,26.82 8.15,26.98 IC3.2 | IC11.4 4.95,27.28 5.18,27.28 5.26,27.36 7.77,27.36 7.92,27.2 IC3.2 | 7.77,30.94 7.77,27.58 IC3.2 | 7.77,30.94 7.77,32.16 C11.1 | v8.08,30.94 7.77,30.94 | IC8.4 30.79,40.46 32.54,40.46 C8.1 32.84,40.31 33.6,40.31 35.51,38.41 36.12,38.41 C19.1 35.89,38.18 v35.89,37.03 | v41.15,22.48 43.28,24.61 44.04,24.61 IC18.4 | 37.87,32.54 36.8,31.47 IC7.2 | 37.87,32.54 38.56,33.22 IC19.4 | v34.21,18.9 32.92,17.6 C5.1 | 37.87,32.54 41.45,28.96 C18.1 | v35.36,30.56 35.36,29.49 R6.1 | IC16.4 37.03,5.18 37.03,4.72 36.2,3.89 36.2,3.73 C16.1 35.89,3.5 34.86,2.48 | 34.86,2.48 34.06,1.68 32.61,1.68 C15.1 | IC17.4 42.52,14.78 39.55,14.78 39.4,14.94 IC6.2 39.62,14.55 39.62,9.6 C17.1 | 34.86,2.48 33.68,3.66 v33.68,3.73 | 31.7,12.72 31.55,12.72 31.32,12.95 30.48,12.95 IC1.21 | 31.7,12.72 32.77,12.72 C2.1 | 27.74,3.05 27.74,1.6 IC15.4 | IC5.2 27.74,3.05 | v31.7,11.28 31.7,12.72 | 20.27,13.03 C3.1 19.2,12.8 v16.84,10.44 | 20.84,13.6 20.95,13.72 21.87,13.72 IC1.5 | 20.84,13.6 20.27,13.03 | IC1.3 21.87,12.12 21.03,12.12 20.34,12.8 20.27,13.03
  Bottom 0.61: v20.5,15.7 19.89,15.09 19.43,15.09 C4.1 | v20.57,13.87 20.84,13.6 | IC14.4 16.76,1.6 14.94,1.6 C14.1 14.63,1.75 13.95,1.75 12.04,3.66 11.43,3.66 C13.1 11.43,3.96 11.43,4.95 v11.51,5.03 | 8.99,8.84 8.99,7.85 IC13.4 | 9.6,9.45 10.67,10.52 IC4.2 | 9.6,9.45 8.99,8.84 | 9.6,9.45 6.02,13.03 C12.1 | v9.14,8.91 8.99,8.84 | v28.42,3.2 27.96,3.2 27.74,3.05 | v38.71,17.75 38.71,16.76 v38.94,16.54 | v14.02,20.57 14.02,22.4
  other vias: 22.4,19.25 24.97,21.46 24.13,25.37 19.02,26.01 25.37,16.1 23.83,14.66 28.83,10.46 30.56,23.42 33.83,23.75 33.63,26.87 28.09,33.35 23.75,35.56 17.14,35.2 20.14,11.53 13.69,18.06 23.7,5.99 14.2,7.49 34.85,2.06 42.93,24.16 33.48,10.95 29.34,21.77
  pour Bottom: 10.83,40.87 36.53,40.87 46.53,24.16 43.49,24.14 41.71,22.35 41.71,19.48 43.4,17.79 46.15,17.81 35.84,0 11.61,0 1.22,17.87 3.93,17.78 5.81,19.67 5.83,22.32 4.03,24.12 1.27,24.13
  pour Top: 10.78,40.77 36.58,40.77 46.54,24.13 43.56,24.13 41.68,22.25 41.68,19.61 43.52,17.77 46.1,17.75 35.86,0 11.63,-0.03 1.27,17.78 3.91,17.78 5.84,19.71 5.84,22.25 3.96,24.13 1.27,24.13
GND1  (via drill 0.35)
  Top 0.61: v16.76,65.25 17.68,65.25 18.9,66.47 C36.2 18.67,66.7 16.15,69.22 16.15,71.58 JP1.1 | v20.04,79.35 21.18,80.49 IC21.2 | v14.48,70.43 14.48,72.49 16.08,74.09 JP1.2 | v11.35,79.58 11.35,77.22 v8.08,73.94 | IC26.2 36.8,74.4 37.64,74.4 41.15,70.89 v41.15,65.48 40.92,65.33 37.49,61.9 | 37.49,61.9 v34.21,61.9 | v35.36,73.56 35.97,73.56 36.58,74.17 IC26.2 | v35.89,80.03 35.89,78.21 36.96,77.14 36.96,74.7 IC26.2 | v31.7,54.28 31.7,52.91 IC24.2 26.14,47.27 24.46,45.59 21.57,45.59 16.99,50.16 16.99,53.21 v16.84,53.44 10.82,53.44 10.74,53.52 IC23.2 | 21.75,58.05 23.62,56.19 J2.6 | 21.75,58.05 21.11,58.7 v20.5,58.7 20.27,58.85 20.04,58.85 15.32,63.58 v14.02,63.58 | 21.75,58.05 v20.57,56.87 | v11.51,48.03 11.51,48.79 9.14,51.16 v9.14,51.92 | v28.42,46.2 29.57,46.2 29.95,46.58 33.45,46.58 v33.68,46.74 33.68,49.63 39.32,55.27 39.32,57.94 IC25.2 39.09,58.17 38.94,58.32 v38.94,59.54 | v38.71,60.76 37.72,61.75 37.49,61.9
  Bottom 0.61: 15.47,70.43 15.47,70.97 16.08,71.58 JP1.1 | 15.47,70.43 15.47,69.06 Q8.2 | 14.02,65.41 13.11,65.41 Q10.2 | 14.02,65.41 15.47,65.41 Q9.2 15.77,65.25 v16.76,65.25 | IC28.4 19.81,83.39 19.81,81.94 21.18,80.57 IC21.2 | R8.1 19.96,78.21 21.79,78.21 Q12.2 | R8.1 19.66,77.98 16.15,74.47 16.15,74.17 JP1.2 15.85,74.09 15.47,74.09 11.35,69.98 8.53,69.98 IC22.2 | v20.04,79.35 20.04,78.51 R8.1 | v14.48,70.43 15.47,70.43 | C25.1 14.86,83.39 13.56,83.39 11.66,81.48 C26.1 11.35,81.33 11.35,81.18 10.44,80.26 10.44,79.81 IC29.4 10.74,79.81 11.12,79.81 v11.35,79.58 | IC31.4 3.43,60.38 3.43,60.76 8.31,65.63 8.31,69.83 8.15,69.98 IC22.2 | IC30.4 4.95,70.28 5.18,70.28 5.26,70.36 7.77,70.36 7.92,70.21 IC22.2 | 7.77,73.94 7.77,70.59 IC22.2 | 7.77,73.94 7.77,75.16 C27.1 | v8.08,73.94 7.77,73.94 | IC27.4 30.79,83.46 32.54,83.46 C24.1 32.84,83.31 33.6,83.31 35.51,81.41 36.12,81.41 C35.1 35.89,81.18 v35.89,80.03 | v41.15,65.48 43.28,67.61 44.04,67.61 IC37.4 | 37.87,75.54 36.8,74.47 IC26.2 | 37.87,75.54 38.56,76.22 IC38.4 | v34.21,61.9 32.92,60.6 C23.1 | 37.87,75.54 41.45,71.96 C34.1 | v35.36,73.56 35.36,72.49 R4.1 | IC35.4 37.03,48.18 37.03,47.73 36.2,46.89 36.2,46.74 C32.1 35.89,46.51 34.86,45.48 | 34.86,45.48 34.06,44.68 32.61,44.68 C31.1 | IC36.4 42.52,57.78 39.55,57.78 39.4,57.94 IC25.2 39.62,57.56 39.62,52.6 C33.1 | 34.86,45.48 33.68,46.66 v33.68,46.74 | 31.7,55.73 31.55,55.73 31.32,55.96 30.48,55.96 IC20.21 | 31.7,55.73 32.77,55.73 C7.1 | 27.74,46.05 27.74,44.6 IC34.4 | IC24.2 27.74,46.05 | v31.7,54.28 31.7,55.73 | 20.27,56.03 C21.1 19.2,55.8 v16.84,53.44 | 20.84,56.6 20.95,56.72 21.87,56.72 IC20.5
  Bottom 0.61: 20.84,56.6 20.27,56.03 | IC20.3 21.87,55.12 21.03,55.12 20.34,55.8 20.27,56.03 | v20.5,58.7 19.89,58.09 19.43,58.09 C22.1 | v20.57,56.87 20.84,56.6 | IC33.4 16.76,44.6 14.94,44.6 C30.1 14.63,44.76 13.95,44.76 12.04,46.66 11.43,46.66 C29.1 11.43,46.97 11.43,47.95 v11.51,48.03 | 8.99,51.84 8.99,50.85 IC32.4 | 9.6,52.45 10.67,53.52 IC23.2 | 9.6,52.45 8.99,51.84 | 9.6,52.45 6.02,56.03 C28.1 | v9.14,51.92 8.99,51.84 | v28.42,46.2 27.96,46.2 27.74,46.05 | v38.71,60.76 38.71,59.77 v38.94,59.54 | v14.02,63.58 14.02,65.41
  other vias: 22.4,62.26 24.97,64.47 24.13,68.38 19.02,69.01 25.37,59.11 23.83,57.66 28.83,53.47 30.56,66.42 33.83,66.75 33.63,69.88 28.09,76.35 23.75,78.56 17.14,78.21 20.14,54.53 13.69,61.06 23.7,49 14.2,50.5 34.85,45.06 42.93,67.16 33.48,53.95 29.34,64.77
  pour Bottom: 10.83,83.87 36.53,83.87 46.53,67.16 43.49,67.14 41.71,65.35 41.71,62.48 43.4,60.79 46.15,60.81 35.84,43 11.61,43 1.22,60.87 3.93,60.78 5.81,62.67 5.83,65.32 4.03,67.12 1.27,67.13
  pour Top: 10.78,83.77 36.58,83.77 46.54,67.13 43.56,67.13 41.68,65.25 41.68,62.61 43.52,60.77 46.1,60.76 35.86,43 11.63,42.98 1.27,60.78 3.91,60.78 5.84,62.71 5.84,65.25 3.96,67.13 1.27,67.13
GND2  (via drill 0.35)
  Top 0.61: v65.25,22.25 66.17,22.25 67.39,23.47 C54.2 67.16,23.7 64.64,26.21 64.64,28.57 JP2.1 | v68.53,36.35 69.67,37.49 IC40.2 | v62.97,27.43 62.97,29.49 64.57,31.09 JP2.2 | v59.84,36.58 59.84,34.21 v56.57,30.94 | IC45.2 85.29,31.39 86.13,31.39 89.64,27.89 v89.64,22.48 89.41,22.33 85.98,18.9 | 85.98,18.9 v82.7,18.9 | v83.84,30.56 84.45,30.56 85.06,31.17 IC45.2 | v84.38,37.03 84.38,35.2 85.45,34.14 85.45,31.7 IC45.2 | v80.19,11.28 80.19,9.91 IC43.2 74.62,4.27 72.95,2.59 70.05,2.59 65.48,7.16 65.48,10.21 v65.33,10.44 59.31,10.44 59.23,10.52 IC42.2 | 70.24,15.05 72.11,13.18 J3.6 | 70.24,15.05 69.6,15.7 v68.99,15.7 68.76,15.85 68.53,15.85 63.8,20.57 v62.51,20.57 | 70.24,15.05 v69.06,13.87 | v59.99,5.03 59.99,5.79 57.63,8.15 v57.63,8.91 | v76.91,3.2 78.05,3.2 78.44,3.58 81.94,3.58 v82.17,3.73 82.17,6.63 87.81,12.27 87.81,14.94 IC44.2 87.58,15.16 87.43,15.32 v87.43,16.54 | v87.2,17.75 86.21,18.75 85.98,18.9
  Bottom 0.61: 63.96,27.43 63.96,27.96 64.57,28.57 JP2.1 | 63.96,27.43 63.96,26.06 Q14.2 | 62.51,22.4 61.59,22.4 Q16.2 | 62.51,22.4 63.96,22.4 Q15.2 64.26,22.25 v65.25,22.25 | IC47.4 68.3,40.39 68.3,38.94 69.67,37.57 IC40.2 | R24.1 68.45,35.2 70.28,35.2 Q18.2 | R24.1 68.15,34.98 64.64,31.47 64.64,31.17 JP2.2 64.34,31.09 63.96,31.09 59.84,26.98 57.02,26.98 IC41.2 | v68.53,36.35 68.53,35.51 R24.1 | v62.97,27.43 63.96,27.43 | C43.1 63.35,40.39 62.05,40.39 60.15,38.48 C44.1 59.84,38.33 59.84,38.18 58.93,37.26 58.93,36.8 IC48.4 59.23,36.8 59.61,36.8 v59.84,36.58 | IC50.4 51.92,17.37 51.92,17.75 56.79,22.63 56.79,26.82 56.64,26.98 IC41.2 | IC49.4 53.44,27.28 53.67,27.28 53.75,27.36 56.26,27.36 56.41,27.2 IC41.2 | 56.26,30.94 56.26,27.58 IC41.2 | 56.26,30.94 56.26,32.16 C45.1 | v56.57,30.94 56.26,30.94 | IC46.4 79.27,40.46 81.03,40.46 C42.1 81.33,40.31 82.09,40.31 84,38.41 84.61,38.41 C53.1 84.38,38.18 v84.38,37.03 | v89.64,22.48 91.77,24.61 92.53,24.61 IC56.4 | 86.36,32.54 85.29,31.47 IC45.2 | 86.36,32.54 87.05,33.22 IC57.4 | v82.7,18.9 81.41,17.6 C41.1 | 86.36,32.54 89.94,28.96 C52.1 | v83.84,30.56 83.84,29.49 R22.1 | IC54.4 85.52,5.18 85.52,4.72 84.68,3.89 84.68,3.73 C50.1 84.38,3.5 83.35,2.48 | 83.35,2.48 82.55,1.68 81.1,1.68 C49.1 | IC55.4 91.01,14.78 88.04,14.78 87.88,14.94 IC44.2 88.11,14.55 88.11,9.6 C51.1 | 83.35,2.48 82.17,3.66 v82.17,3.73 | 80.19,12.72 80.03,12.72 79.81,12.95 78.97,12.95 IC39.21 | 80.19,12.72 81.25,12.72 C38.1 | 76.22,3.05 76.22,1.6 IC53.4 | IC43.2 76.22,3.05 | v80.19,11.28 80.19,12.72 | 68.76,13.03 C39.1 67.69,12.8 v65.33,10.44 | 69.33,13.6 69.44,13.72 70.36,13.72 IC39.5
  Bottom 0.61: 69.33,13.6 68.76,13.03 | IC39.3 70.36,12.12 69.52,12.12 68.83,12.8 68.76,13.03 | v68.99,15.7 68.38,15.09 67.92,15.09 C40.1 | v69.06,13.87 69.33,13.6 | IC52.4 65.25,1.6 63.42,1.6 C48.1 63.12,1.75 62.43,1.75 60.53,3.66 59.92,3.66 C47.1 59.92,3.96 59.92,4.95 v59.99,5.03 | 57.48,8.84 57.48,7.85 IC51.4 | 58.09,9.45 59.16,10.52 IC42.2 | 58.09,9.45 57.48,8.84 | 58.09,9.45 54.51,13.03 C46.1 | v57.63,8.91 57.48,8.84 | v76.91,3.2 76.45,3.2 76.22,3.05 | v87.2,17.75 87.2,16.76 v87.43,16.54 | v62.51,20.57 62.51,22.4
  other vias: 70.89,19.25 73.46,21.46 72.62,25.37 67.51,26.01 73.86,16.1 72.31,14.66 77.32,10.46 79.04,23.42 82.32,23.75 82.12,26.87 76.58,33.35 72.24,35.56 65.63,35.2 68.63,11.53 62.18,18.06 72.19,5.99 62.69,7.49 83.34,2.06 91.41,24.16 81.97,10.95 77.83,21.77
  pour Bottom: 59.32,40.87 85.02,40.87 95.01,24.16 91.98,24.14 90.2,22.35 90.2,19.48 91.89,17.79 94.64,17.81 84.33,0 60.1,0 49.7,17.87 52.42,17.78 54.3,19.67 54.32,22.32 52.52,24.12 49.76,24.13
  pour Top: 59.27,40.77 85.07,40.77 95.03,24.13 92.05,24.13 90.17,22.25 90.17,19.61 92.01,17.77 94.59,17.75 84.35,0 60.12,-0.03 49.76,17.78 52.4,17.78 54.33,19.71 54.33,22.25 52.45,24.13 49.76,24.13
GND3  (via drill 0.35)
  Top 0.61: v65.25,65.25 66.17,65.25 67.39,66.47 C72.2 67.16,66.7 64.64,69.22 64.64,71.58 JP4.1 | v68.53,79.35 69.67,80.49 IC59.2 | v62.97,70.43 62.97,72.49 64.57,74.09 JP4.2 | v59.84,79.58 59.84,77.22 v56.57,73.94 | IC64.2 85.29,74.4 86.13,74.4 89.64,70.89 v89.64,65.48 89.41,65.33 85.98,61.9 | 85.98,61.9 v82.7,61.9 | v83.84,73.56 84.45,73.56 85.06,74.17 IC64.2 | v84.38,80.03 84.38,78.21 85.45,77.14 85.45,74.7 IC64.2 | v80.19,54.28 80.19,52.91 IC62.2 74.62,47.27 72.95,45.59 70.05,45.59 65.48,50.16 65.48,53.21 v65.33,53.44 59.31,53.44 59.23,53.52 IC61.2 | 70.24,58.05 72.11,56.19 J4.6 | 70.24,58.05 69.6,58.7 v68.99,58.7 68.76,58.85 68.53,58.85 63.8,63.58 v62.51,63.58 | 70.24,58.05 v69.06,56.87 | v59.99,48.03 59.99,48.79 57.63,51.16 v57.63,51.92 | v76.91,46.2 78.05,46.2 78.44,46.58 81.94,46.58 v82.17,46.74 82.17,49.63 87.81,55.27 87.81,57.94 IC63.2 87.58,58.17 87.43,58.32 v87.43,59.54 | v87.2,60.76 86.21,61.75 85.98,61.9
  Bottom 0.61: 63.96,70.43 63.96,70.97 64.57,71.58 JP4.1 | 63.96,70.43 63.96,69.06 Q20.2 | 62.51,65.41 61.59,65.41 Q22.2 | 62.51,65.41 63.96,65.41 Q21.2 64.26,65.25 v65.25,65.25 | IC66.4 68.3,83.39 68.3,81.94 69.67,80.57 IC59.2 | R34.1 68.45,78.21 70.28,78.21 Q24.2 | R34.1 68.15,77.98 64.64,74.47 64.64,74.17 JP4.2 64.34,74.09 63.96,74.09 59.84,69.98 57.02,69.98 IC60.2 | v68.53,79.35 68.53,78.51 R34.1 | v62.97,70.43 63.96,70.43 | C61.1 63.35,83.39 62.05,83.39 60.15,81.48 C62.1 59.84,81.33 59.84,81.18 58.93,80.26 58.93,79.81 IC67.4 59.23,79.81 59.61,79.81 v59.84,79.58 | IC69.4 51.92,60.38 51.92,60.76 56.79,65.63 56.79,69.83 56.64,69.98 IC60.2 | IC68.4 53.44,70.28 53.67,70.28 53.75,70.36 56.26,70.36 56.41,70.21 IC60.2 | 56.26,73.94 56.26,70.59 IC60.2 | 56.26,73.94 56.26,75.16 C63.1 | v56.57,73.94 56.26,73.94 | IC65.4 79.27,83.46 81.03,83.46 C60.1 81.33,83.31 82.09,83.31 84,81.41 84.61,81.41 C71.1 84.38,81.18 v84.38,80.03 | v89.64,65.48 91.77,67.61 92.53,67.61 IC75.4 | 86.36,75.54 85.29,74.47 IC64.2 | 86.36,75.54 87.05,76.22 IC76.4 | v82.7,61.9 81.41,60.6 C59.1 | 86.36,75.54 89.94,71.96 C70.1 | v83.84,73.56 83.84,72.49 R32.1 | IC73.4 85.52,48.18 85.52,47.73 84.68,46.89 84.68,46.74 C68.1 84.38,46.51 83.35,45.48 | 83.35,45.48 82.55,44.68 81.1,44.68 C67.1 | IC74.4 91.01,57.78 88.04,57.78 87.88,57.94 IC63.2 88.11,57.56 88.11,52.6 C69.1 | 83.35,45.48 82.17,46.66 v82.17,46.74 | 80.19,55.73 80.03,55.73 79.81,55.96 78.97,55.96 IC58.21 | 80.19,55.73 81.25,55.73 C56.1 | 76.22,46.05 76.22,44.6 IC72.4 | IC62.2 76.22,46.05 | v80.19,54.28 80.19,55.73 | 68.76,56.03 C57.1 67.69,55.8 v65.33,53.44 | 69.33,56.6 69.44,56.72 70.36,56.72 IC58.5
  Bottom 0.61: 69.33,56.6 68.76,56.03 | IC58.3 70.36,55.12 69.52,55.12 68.83,55.8 68.76,56.03 | v68.99,58.7 68.38,58.09 67.92,58.09 C58.1 | v69.06,56.87 69.33,56.6 | IC71.4 65.25,44.6 63.42,44.6 C66.1 63.12,44.76 62.43,44.76 60.53,46.66 59.92,46.66 C65.1 59.92,46.97 59.92,47.95 v59.99,48.03 | 57.48,51.84 57.48,50.85 IC70.4 | 58.09,52.45 59.16,53.52 IC61.2 | 58.09,52.45 57.48,51.84 | 58.09,52.45 54.51,56.03 C64.1 | v57.63,51.92 57.48,51.84 | v76.91,46.2 76.45,46.2 76.22,46.05 | v87.2,60.76 87.2,59.77 v87.43,59.54 | v62.51,63.58 62.51,65.41
  other vias: 70.89,62.26 73.46,64.47 72.62,68.38 67.51,69.01 73.86,59.11 72.31,57.66 77.32,53.47 79.04,66.42 82.32,66.75 82.12,69.88 76.58,76.35 72.24,78.56 65.63,78.21 68.63,54.53 62.18,61.06 72.19,49 62.69,50.5 83.34,45.06 91.41,67.16 81.97,53.95 77.83,64.77
  pour Bottom: 59.32,83.87 85.02,83.87 95.01,67.16 91.98,67.14 90.2,65.35 90.2,62.48 91.89,60.79 94.64,60.81 84.33,43 60.1,43 49.7,60.87 52.42,60.78 54.3,62.67 54.32,65.32 52.52,67.12 49.76,67.13
  pour Top: 59.27,83.77 85.07,83.77 95.03,67.13 92.05,67.13 90.17,65.25 90.17,62.61 92.01,60.77 94.59,60.76 84.35,43 60.12,42.98 49.76,60.78 52.4,60.78 54.33,62.71 54.33,65.25 52.45,67.13 49.76,67.13
LED1
  Bottom 0.508: LED1.1 28.88,34.9 30.4,34.9 31.47,33.83 31.7,33.83 Q1.3 32,33.76 33.6,32.16 33.6,29.49 R6.2 33.6,29.18 33.6,29.03 36.8,25.83 37.11,25.83 LED4.1
LED2  (via drill 0.35)
  Top 0.508: 26.75,21.03 24.31,23.47 C20.1 | 26.75,21.03 28.04,19.74 28.5,19.74 R12.1 | v32.84,34.06 32.84,27.66 30.02,24.84 30.02,24.31 26.75,21.03
  Bottom 0.508: R1.1 30.94,37.87 32.84,35.97 Q1.2 32.84,35.66 v32.84,34.06
LED3  (via drill 0.35)
  Top 0.508: v35.59,16.23 34.59,15.24 34.59,11.81 LED5.1 | v37.41,22.33 37.41,22.63 38.33,23.55 LED4.2
  Bottom 0.508: v35.59,16.23 37.03,16.23 37.41,16.61 v37.41,22.33
LED4
  Top 0.508: LED2.1 23.77,32.38 26.29,34.9 LED1.2
LED5  (via drill 0.35)
  Top 0.508: v26.82,7.32 26.59,7.09 21.26,7.09 LED6.1
  Bottom 0.508: v26.82,7.32 29.34,7.32 31.62,9.6 LED5.2
LED6
  Top 0.508: LED3.1 9.14,18.44 9.14,23.16 12.88,26.9 12.88,30.18 LED2.2
LED7  (via drill 0.35)
  Top 0.508: v26.9,19.66 26.9,18.67 29.11,16.46 29.34,16.46 R2.2 29.34,16.15 29.34,14.17 29.41,14.1 29.41,12.19 27.66,10.44 27.66,7.01 26.29,5.64 25.83,5.64 24.84,4.65 24.84,4.04 24.16,3.35 22.33,3.35 18.67,7.01 LED6.2
  Bottom 0.508: R14.2 27.05,25.38 27.05,21.34 R15.2 26.9,21.11 v26.9,19.66 | LED3.2 10.44,16.15 10.44,14.02 17.37,7.09 18.67,7.09 LED6.2
LED8
  Bottom 0.508: Q2.3 20.88,25.07 21.18,25.38 R14.1
LED9
  Bottom 0.508: Q3.3 17.68,21.34 21.18,21.34 R15.1
LED10  (via drill 0.35)
  Top 0.508: v11.89,21.41 15.54,21.41 20.34,16.61 23.39,16.61 23.55,16.46 R2.1
  Bottom 0.508: v11.89,21.41 11.05,22.25 11.05,23.39 Q4.3
LED11
  Top 0.508: LED8.1 23.77,75.39 26.29,77.9 LED7.2
LED12
  Top 0.508: LED9.1 9.14,61.44 9.14,66.17 12.88,69.9 12.88,73.18 LED8.2
LED13  (via drill 0.35)
  Top 0.508: v35.59,59.23 34.59,58.24 34.59,54.81 LED11.1 | v37.41,65.33 37.41,65.63 38.33,66.55 LED10.2
  Bottom 0.508: v35.59,59.23 37.03,59.23 37.41,59.61 v37.41,65.33
LED14  (via drill 0.35)
  Top 0.508: v26.82,50.32 26.59,50.09 21.26,50.09 LED12.1
  Bottom 0.508: v26.82,50.32 29.34,50.32 31.62,52.6 LED11.2
LED15
  Bottom 0.508: LED7.1 28.88,77.9 30.4,77.9 31.47,76.83 31.7,76.83 Q7.3 32,76.76 33.6,75.16 33.6,72.49 R4.2 33.6,72.19 33.6,72.03 36.8,68.83 37.11,68.83 LED10.1
LED16  (via drill 0.35)
  Top 0.508: v26.9,62.66 26.9,61.67 29.11,59.46 29.34,59.46 R20.2 29.34,59.16 29.34,57.17 29.41,57.1 29.41,55.19 27.66,53.44 27.66,50.01 26.29,48.64 25.83,48.64 24.84,47.65 24.84,47.04 24.16,46.35 22.33,46.35 18.67,50.01 LED12.2
  Bottom 0.508: R18.2 27.05,68.38 27.05,64.34 R19.2 26.9,64.11 v26.9,62.66 | LED9.2 10.44,59.16 10.44,57.02 17.37,50.09 18.67,50.09 LED12.2
LED17
  Bottom 0.508: Q8.3 20.88,68.07 21.18,68.38 R18.1
LED18
  Bottom 0.508: Q9.3 17.68,64.34 21.18,64.34 R19.1
LED19  (via drill 0.35)
  Top 0.508: v11.89,64.41 15.54,64.41 20.34,59.61 23.39,59.61 23.55,59.46 R20.1
  Bottom 0.508: v11.89,64.41 11.05,65.25 11.05,66.4 Q10.3
LED20  (via drill 0.35)
  Top 0.508: 26.75,64.03 24.31,66.47 C36.1 | 26.75,64.03 28.04,62.74 28.5,62.74 R17.1 | v32.84,77.06 32.84,70.66 30.02,67.84 30.02,67.31 26.75,64.03
  Bottom 0.508: R3.1 30.94,80.87 32.84,78.97 Q7.2 32.84,78.66 v32.84,77.06
LED21
  Top 0.508: LED14.1 72.26,32.38 74.78,34.9 LED13.2
LED22
  Top 0.508: LED15.1 57.63,18.44 57.63,23.16 61.37,26.9 61.37,30.18 LED14.2
LED23  (via drill 0.35)
  Top 0.508: v84.07,16.23 83.08,15.24 83.08,11.81 LED17.1 | v85.9,22.33 85.9,22.63 86.82,23.55 LED16.2
  Bottom 0.508: v84.07,16.23 85.52,16.23 85.9,16.61 v85.9,22.33
LED24  (via drill 0.35)
  Top 0.508: v75.31,7.32 75.08,7.09 69.75,7.09 LED18.1
  Bottom 0.508: v75.31,7.32 77.83,7.32 80.11,9.6 LED17.2
LED25
  Bottom 0.508: LED13.1 77.37,34.9 78.89,34.9 79.96,33.83 80.19,33.83 Q13.3 80.49,33.76 82.09,32.16 82.09,29.49 R22.2 82.09,29.18 82.09,29.03 85.29,25.83 85.6,25.83 LED16.1
LED26  (via drill 0.35)
  Top 0.508: v75.39,19.66 75.39,18.67 77.6,16.46 77.83,16.46 R30.2 77.83,16.15 77.83,14.17 77.9,14.1 77.9,12.19 76.15,10.44 76.15,7.01 74.78,5.64 74.32,5.64 73.33,4.65 73.33,4.04 72.64,3.35 70.81,3.35 67.16,7.01 LED18.2
  Bottom 0.508: R28.2 75.54,25.38 75.54,21.34 R29.2 75.39,21.11 v75.39,19.66 | LED15.2 58.93,16.15 58.93,14.02 65.86,7.09 67.16,7.09 LED18.2
LED27
  Bottom 0.508: Q14.3 69.37,25.07 69.67,25.38 R28.1
LED28
  Bottom 0.508: Q15.3 66.17,21.34 69.67,21.34 R29.1
LED29  (via drill 0.35)
  Top 0.508: v60.38,21.41 64.03,21.41 68.83,16.61 71.88,16.61 72.03,16.46 R30.1
  Bottom 0.508: v60.38,21.41 59.54,22.25 59.54,23.39 Q16.3
LED30  (via drill 0.35)
  Top 0.508: 75.23,21.03 72.8,23.47 C54.1 | 75.23,21.03 76.53,19.74 76.99,19.74 R27.1 | v81.33,34.06 81.33,27.66 78.51,24.84 78.51,24.31 75.23,21.03
  Bottom 0.508: R21.1 79.43,37.87 81.33,35.97 Q13.2 81.33,35.66 v81.33,34.06
LED31
  Top 0.508: LED20.1 72.26,75.39 74.78,77.9 LED19.2
LED32
  Top 0.508: LED21.1 57.63,61.44 57.63,66.17 61.37,69.9 61.37,73.18 LED20.2
LED33  (via drill 0.35)
  Top 0.508: v84.07,59.23 83.08,58.24 83.08,54.81 LED23.1 | v85.9,65.33 85.9,65.63 86.82,66.55 LED22.2
  Bottom 0.508: v84.07,59.23 85.52,59.23 85.9,59.61 v85.9,65.33
LED34  (via drill 0.35)
  Top 0.508: v75.31,50.32 75.08,50.09 69.75,50.09 LED24.1
  Bottom 0.508: v75.31,50.32 77.83,50.32 80.11,52.6 LED23.2
LED35
  Bottom 0.508: LED19.1 77.37,77.9 78.89,77.9 79.96,76.83 80.19,76.83 Q19.3 80.49,76.76 82.09,75.16 82.09,72.49 R32.2 82.09,72.19 82.09,72.03 85.29,68.83 85.6,68.83 LED22.1
LED36  (via drill 0.35)